# Altium PCB Main.PcbDoc (part 2 of 2)
Units mm, origin at the board's own origin, x right, y up, seen from the top; angles counter-clockwise.
Board outline 229.74 x 100.58 mm, 4 copper layers (Top Layer, Layer 1, Layer 2, Bottom Layer), stack 0.68 mm thick; 134 components, 86 nets, 560 pads, 37 vias.
Unrouted connection lines stored in the file: 186.
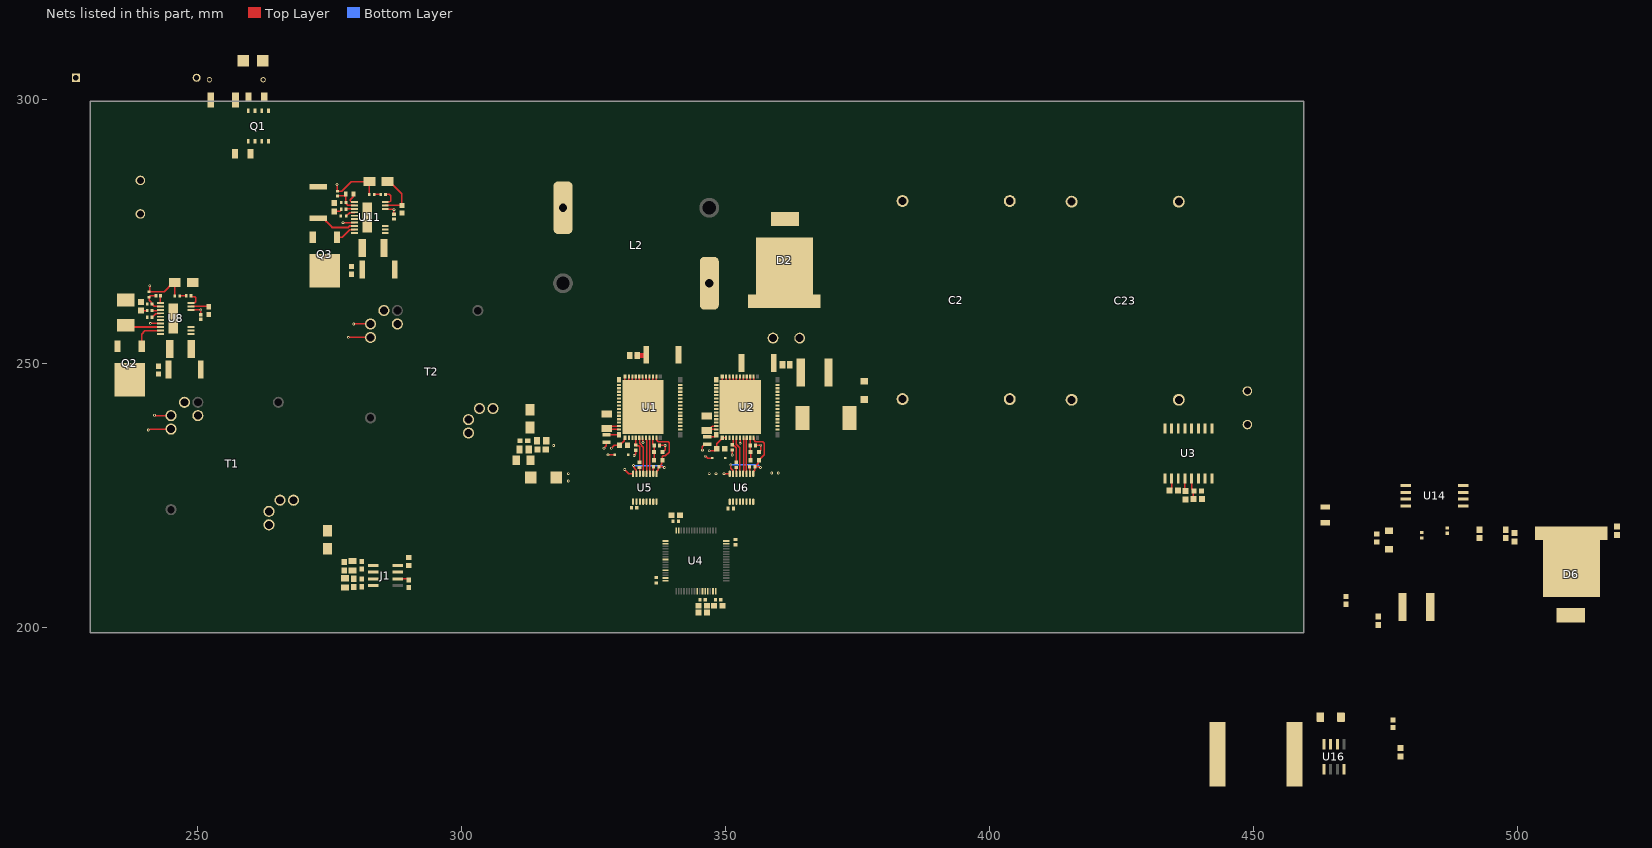
[diagram p4: the nets of this part, all layers, seen from the top]

## Part data
C1 C62: library part CAP-470n, "0.47 µF ±10% 630V Ceramic Capacitor X7R 2220 (5750 Metric)", Capacitance=470nF, Mfr_Name=Kemet, Voltage=630V, ComponentLink1Description=Datasheet, ComponentLink1URL=https://search.murata.co.jp/Ceramy/image/img/A01X/G101/ENG/GRM55DR7LV474KW01-00B.pdf
C2 C23: library part CAP-40u, "40 µF Film Capacitor 600V Polypropylene (PP), Metallized Radial - 4 Leads", Capacitance=40uF, Insulation Resistance=250MOhm, Manufacturer="Wurth Elektronik", Operating Temperature Max=105°C, Operating Temperature Min=-40°C, Rate of Voltage Rise=30V/us, Rated Voltage (DC)=600V, Category="Film Capacitors", ComponentLink1Description="Website Link", ComponentLink1URL=https://www.we-online.com/redexpert/article/890764428004CS?ad, ComponentLink2Description="Datasheet Link", ComponentLink2URL=https://www.we-online.com/redexpert/spec/890764428004CS?ad, Dissipation Factor @1kHz=0.2%, Height=45mm, Length=42mm, Manufacturer Part Number=890764428004CS, Match Code=WCAP-FTDB, Mount="Through Hole", Packaging=Carton, Pitch=37.5mm, Technical Reference=MDBP375406J600DCPP15040, Voltage=600V, Width=30mm
C3 C6: library part CAP-33p-1kV, "SMD Comm C0G HV, Ceramic, 33 pF, 5%, 1000 VDC, C0G, SMD, MLCC, Ultra-Stable, Low Loss, Class I, 0805", Manufacturer_Name=Kemet, Copyright="Copyright (C) 2025 Ultra Librarian. All rights reserved.", Datasheet=https://search.kemet.com/download/datasheet/C0805C330JDGAC7800, Manufacturer_Part_Number=C0805C330JDGACTU, Parameter 1=33pF, Parameter 2=1kV
C4: library part CAP-4.7n, "4700 pF ±5% 630V Ceramic Capacitor C0G, NP0 1206 (3216 Metric)", Capacitance=4.7nF, Insulation Resistance=250MOhm, Manufacturer="Wurth Elektronik", Manufacturer Part Number=890764428004CS, Operating Temperature Max=105°C, Operating Temperature Min=-40°C, Rate of Voltage Rise=30V/us, Rated Voltage (DC)=600V, Voltage=630V, Category="Film Capacitors", ComponentLink2Description="Datasheet Link", ComponentLink2URL=https://www.yageo.com/upload/media/product/app/datasheet/mlcc/upy-np0x7r_hv_500v-to-3kv.pdf, Dissipation Factor @1kHz=0.2%, Height=45mm, Length=42mm, Match Code=WCAP-FTDB, Mount="Through Hole", Packaging=Carton, Pitch=37.5mm, Technical Reference=MDBP375406J600DCPP15040, Width=30mm
C5: library part CAP-1n, "1000 pF ±5% 200V Ceramic Capacitor C0G, NP0 1206 (3216 Metric)", Package="3216 KEMET", Check_prices=https://www.snapeda.com/parts/C1206C102J2GACTU/KEMET/view-part/?ref=eda, ComponentLink1Description=Datasheet, ComponentLink1URL=https://search.kemet.com/download/datasheet/C1206C102J2GAC7800, MF=KEMET, MP=C1206C102J2GACTU, Parameter 1=200V, SnapEDA_Link=https://www.snapeda.com/parts/C1206C102J2GACTU/KEMET/view-part/?ref=snap
C7: library part CAP-40n, "0.047 µF ±5% 250V Ceramic Capacitor C0G, NP0 1812 (4532 Metric)", Capacitance=40uF, Insulation Resistance=250MOhm, Manufacturer="Wurth Elektronik", Manufacturer Part Number=890764428004CS, Operating Temperature Max=105°C, Operating Temperature Min=-40°C, Rate of Voltage Rise=30V/us, Rated Voltage (DC)=600V, Category="Film Capacitors", ComponentLink2Description=Datasheet, ComponentLink2URL=https://product.tdk.com/en/system/files/dam/doc/product/capacitor/ceramic/mlcc/catalog/mlcc_commercial_midvoltage_en.pdf, Dissipation Factor @1kHz=0.2%, Height=45mm, Length=42mm, Match Code=WCAP-FTDB, Mount="Through Hole", Packaging=Carton, Pitch=37.5mm, Technical Reference=MDBP375406J600DCPP15040, Voltage=600V, Width=30mm
C8 C9 C10 C11 C16 C17 C18 C20 C49 C59 C60: library part CAP-0.1U-0001, "CAP CER 0.1UF 16V X7R 0402", Capacitance="100 nF", Voltage Rating="16 V", ComponentLink2Description=Datasheet, ComponentLink2URL=https://www.yageo.com/upload/media/product/productsearch/datasheet/mlcc/UPY-GPHC_X7R_6.3V-to-250V_24.pdf, Device Class=Ceramic, Size=0402
C12 C30 C31 C42 C50 C66: library part CAP-4.7U-0001, "CAP CER 4.7UF 25V X5R 0603", Capacitance="4.7 uF", Voltage=25V, Device Class=Ceramic, Size=0603
C13 C15 C52 C58 C61: library part CAP-1U-0002, "CAP CER 1UF 16V X7R 0603", Capacitance="1.0 uF", Voltage=16V, Device Class=Ceramic, Size=0603
C14 C64: library part CAP-10N-0002, "CAP CER 10000PF 50V X7R 0603", Capacitance="10 nF", Voltage="50 V", ComponentLink2Description=Datasheet, ComponentLink2URL=http://www.yageo.com/documents/recent/UPY-GPHC_X7R_6.3V-to-50V_18.pdf, Device Class=Ceramic, Size=0603
C19 C22: library part CAP-2.2U-0001, "CAP CER 2.2UF 100V X7R 1206", Capacitance=2.2uF, Voltage=100V, ComponentLink1Description=Datasheet, ComponentLink1URL=https://www.yageo.com/upload/media/product/productsearch/datasheet/mlcc/UPY-GPHC_X7R_6.3V-to-250V_24.pdf, Device Class=Ceramic, Size=1206
C21: library part CAP-40u_25V, "47 µF ±20% 25V Ceramic Capacitor X5R 1206 (3216 Metric)", Capacitance=40uF, Insulation Resistance=250MOhm, Manufacturer="Wurth Elektronik", Manufacturer Part Number=890764428004CS, Operating Temperature Max=105°C, Operating Temperature Min=-40°C, Rate of Voltage Rise=30V/us, Rated Voltage (DC)=600V, Voltage=25V, Category="Film Capacitors", ComponentLink2Description="Datasheet Link", ComponentLink2URL=https://product.tdk.com/system/files/dam/doc/product/capacitor/ceramic/mlcc/catalog/mlcc_commercial_general_en.pdf, Dissipation Factor @1kHz=0.2%, Height=45mm, Length=42mm, Match Code=WCAP-FTDB, Mount="Through Hole", Packaging=Carton, Pitch=37.5mm, Technical Reference=MDBP375406J600DCPP15040, Width=30mm
C24 C25 C55 C56: library part CAP-100P-0001, "CAP CER 100PF 50V C0G/NPO 0402", Capacitance="100 pF", Voltage=50V, ComponentLink1Description=Datasheet, ComponentLink1URL=https://www.yageo.com/upload/media/product/productsearch/datasheet/mlcc/UPY-GP_NP0_16V-to-50V_18.pdf, Device Class=Ceramic, Size=0402
C26 C38: library part CAP-1.5n-250V, "1500 pF ±5% 250V Ceramic Capacitor C0G, NP0 0603 (1608 Metric)", Manufacturer_Name=Kemet, Manufacturer_Part_Number=C0805C330JDGACTU, Copyright="Copyright (C) 2025 Ultra Librarian. All rights reserved.", Datasheet="1500 pF ±5% 250V Ceramic Capacitor C0G, NP0 0603 (1608 Metric)", Parameter 1=1.5nF, Parameter 2=250V
C27 C32 C34 C39 C44 C51 C54 C63 C67: library part CAP-100n, "0.1 µF ±10% 50V Ceramic Capacitor X7R 0603 (1608 Metric)", Capacitance=100nF, Mfr_Name=Yageo, Voltage=50V, ComponentLink1Description=Datasheet, ComponentLink1URL=https://www.yageo.com/upload/media/product/productsearch/datasheet/mlcc/UPY-GPHC_X7R_6.3V-to-250V_24.pdf
C28 C29 C40 C41: library part CAP-1U-0001, "CAP CER 1UF 50V X7R 0805", Capacitance="1.0 uF", Voltage="50 V", ComponentLink2Description=Datasheet, ComponentLink2URL=https://www.yageo.com/upload/media/product/productsearch/datasheet/mlcc/UPY-GPHC_X7R_6.3V-to-250V_24.pdf, Device Class=Ceramic, Size=0805
C33 C43: library part CAP-1u-200V, "1 µF ±10% 200V Ceramic Capacitor X7R 1812 (4532 Metric)", Capacitance=1uF, Mfr_Name=Yageo, Voltage=200V, ComponentLink1Description=Datasheet, ComponentLink1URL=https://datasheets.kyocera-avx.com/KGM_X7R.pdf
C35 C45: library part CAP-2.2u-25V, "2.2 µF ±10% 25V Ceramic Capacitor X5R 0402 (1005 Metric)", Capacitance=2.2uF, Mfr_Name=Yageo, Voltage=25V, ComponentLink1Description=Datasheet, ComponentLink1URL=https://search.kemet.com/download/datasheet/C0603C222J2GAC7867
C36 C46: library part CAP-47pF-50V, "47 pF ±1% 50V Ceramic Capacitor C0G, NP0 0402 (1005 Metric)", Capacitance=47pF, Mfr_Name=Yageo, Voltage=50V, ComponentLink1Description=Datasheet, ComponentLink1URL=https://search.kemet.com/download/datasheet/C0402C470F5GAC7867
C37 C47: library part CAP-0.22U-0001, "CAP CER 0.22UF 50V X7R 0603", Capacitance=0.22uF, Voltage=50V, ComponentLink1Description=Datasheet, ComponentLink1URL=https://www.yageo.com/upload/media/product/productsearch/datasheet/mlcc/UPY-GPHC_X7R_6.3V-to-250V_24.pdf, Device Class=Ceramic, Size=0603
C48 C57: library part CAP-10u-25V, "10 µF ±10% 25V Ceramic Capacitor X5R 0603 (1608 Metric)", Capacitance=10uF, Mfr_Name=Yageo, Voltage=25V, ComponentLink1Description=Datasheet, ComponentLink1URL=https://search.murata.co.jp/Ceramy/image/img/A01X/G101/ENG/GRM188R61E106KA73-01.pdf
C53 C65: library part CAP-10u, "10 µF ±20% 16V Ceramic Capacitor X6S 0603 (1608 Metric)", Capacitance=10uF, Mfr_Name=Kemet, Voltage=16V, ComponentLink1Description=Datasheet, ComponentLink1URL=https://search.murata.co.jp/Ceramy/image/img/A01X/G101/ENG/GRM188C81C106MA73-01.pdf
D1: library part DIO-ZENER-600, "Diode 600 V 12A Through Hole TO-220AC", Mfr_Name=STMicroelectronics, ComponentLink1Description=Datasheet, ComponentLink1URL=https://www.st.com/content/ccc/resource/technical/document/datasheet/cb/a3/4c/74/1c/4a/40/56/CD00002494.pdf/files/CD00002494.pdf/jcr:content/translations/en.CD00002494.pdf, Parameter 1=600V, Parameter 2=12A
D2 D6: library part DIO-TVS-240, "295V (Typ) Clamp 100A Ipp Tvs Diode Surface Mount", Current Rating=100A, Standoff Voltage=240V, ComponentLink1Description=Datasheet, ComponentLink1URL=https://www.bourns.com/docs/product-datasheets/ptvs1-240c-m.pdf
D3: library part DIO-TVS-21.2V-28.8A, "21.2V Clamp 28.8A Ipp Tvs Diode Surface Mount DO-214AA (SMB)", Mfr_Name="Littelfuse Inc", ComponentLink1Description=Datasheet, ComponentLink1URL=https://www.bourns.com/docs/Product-Datasheets/P6SMB.pdf, Parameter 1=21.2V, Parameter 2=28.8A
D4 D5: library part DIO-ZENER-16V, "Zener Diode 16 V 300 mW ±6% Surface Mount SOD-323", Mfr_Name=STMicroelectronics, ComponentLink1Description=Datasheet, ComponentLink1URL=SOD-323_1P8X1P35_ONS-L, Parameter 2=16V
J1: library part LDO-3v3, "Linear Voltage Regulator IC Positive Fixed 1 Output 1.5A 8-SOIC", Package=None, Availability=Unavailable, ComponentLink1Description=Datasheet, ComponentLink1URL=https://ww1.microchip.com/downloads/en/DeviceDoc/21999b.pdf, MP=MCP1727T-3302E/SN, Price=None
J2 J3: library part CONN-300V-30A-2POS, "6.35mm Pitch Beau Eurostyle Fixed Mount PCB Terminal Block, Modular, 2 Circuits", Manufacturer_Name="Molex Connector Corporation", Copyright="Copyright (C) 2025 Ultra Librarian. All rights reserved.", Datasheet=https://www.molex.com/en-us/products/part-detail-pdf/393800102?display=pdf, Manufacturer_Part_Number=393800102, RefDes=RefDes, Type="Headers, Plugs and Sockets"
L1: library part IND-2.5u, "2.5 µH Shielded Drum Core, Wirewound Inductor 18.1 A 5.9mOhm Max 2-SMD, J-Lead", Mfr_Name=Panasonic, ComponentLink1Description=Datasheet, ComponentLink1URL=https://industrial.panasonic.com/cdbs/www-data/pdf/AGL0000/AGL0000C59.pdf, Parameter 1=2.5uH, Parameter 2=5.8mOhm, Parameter 3=18.1A
L2: library part IND-33u-32A-6m, "WE-HCFT THT High Current Inductor, size 3540, 33µH, 32A", Case/Size Code=3540, DC Resistance=5.67mΩ, DC Resistance Max=6.38mΩ, Inductance=33µH, Inductance Tolerance=20%, Manufacturer="Wurth Elektronik", Max Operating Temperature=125°C, Min Operating Temperature=-40°C, Rated Current=32A, Saturation Current=38.9A, Self Resonant Frequency=7MHz, Category="Power Inductors", ComponentLink1Description="Website Link", ComponentLink1URL=https://www.we-online.com/redexpert/article/7443763540330?ad, ComponentLink2Description="Datasheet Link", ComponentLink2URL=https://www.we-online.com/redexpert/spec/7443763540330?ad, Height=35mm, Length=36mm, Manufacturer Part Number=7443763540330, Match Code=WE-HCFT, Mount="Through Hole", Packaging=Tray, Parameter 1=6.38mOhm, Parameter 2=32A, Parameter 3=33uH, Width=41mm
L3 L4: library part IND-4.7u, "4.7 µH Shielded Inductor 1 A 426mOhm Max 0806 (2016 Metric)", ComponentLink1Description=Datasheet, ComponentLink1URL=https://www.cyntec.com/upfile/products/download/SDEM20161T-000%20(A4).pdf, Parameter 1=4.7uH, Parameter 2=426mOhm, Parameter 3=1A
L5: library part IND-100u, "IHLP-6767GZ-11 100 20% ER E3", Manufacturer_Name=Vishay, Copyright="Copyright (C) 2025 Ultra Librarian. All rights reserved.", Datasheet=https://www.vishay.com/doc?34282, Manufacturer_Part_Number=IHLP6767GZER101M11, Parameter 1=100uH, Parameter 2=5A, Parameter 3=110mOhm
Q1: library part MOSFET-PCH, "P-Channel 30 V 25.4A (Ta), 100A (Tc) 2.5W (Ta), 125W (Tc) Surface Mount PG-TDSON-8-1", Manufacturer="Infineon Technologies", ComponentLink1Description=Datasheet, ComponentLink1URL=https://www.infineon.com/dgdl/BSC030P03NS3+G_2.0.pdf?folderId=db3a304314dca38901154a72e3951a65&fileId=db3a30431d8a6b3c011d90d084910435, Manufacturer Order Number="BSC030P03NS3 G", PackageReference=PG-TDSON-8-1
Q2 Q3: library part FET-800V-11A, "Insulated-Gate Field-Effect Transistor (IGFET), N-Channel, Enhancement, Body Diode, ESD Diode Gate/Source, Pin 1 Gate, 2 Drain, 3 Source, 3 Pins", Manufacturer="Infineon Technologies", ComponentLink1Description=Datasheet, ComponentLink1URL=https://www.infineon.com/dgdl/Infineon-IPD80R450P7-DS-v02_00-EN.pdf?fileId=5546d4625607bd1301562e3b26963327, Manufacturer Order Number=IPD80R450P7, PackageReference=PG-TO252-3-342
R1: library part RES-100k-0001, "RES SMD 100K OHM 1% 1/10W 0603", Power=100mW, Resistance=100k, Tolerance=1%, ComponentLink1Description=Datasheet, ComponentLink1URL=https://www.yageo.com/upload/media/product/products/datasheet/rchip/PYu-RC_Group_51_RoHS_L_12.pdf, Size=0603
R2 R3: library part RES-240-2W, "240 Ohms ±1% 2W Chip Resistor 2512 (6332 Metric) Automotive AEC-Q200, Moisture Resistant Thick Film", Power=2W, Resistance=240, ComponentLink1Description=Datasheet, ComponentLink1URL=https://www.te.com/commerce/DocumentDelivery/DDEController?Action=srchrtrv&DocNm=9-1773463-5&DocType=DS&DocLang=English
R4: library part RES-125k, "150 kOhms ±5% 0.667W, 2/3W Chip Resistor 1206 (3216 Metric) Automotive AEC-Q200, Pulse Withstanding Thick Film", Power=2/3W, Resistance=125k, ComponentLink1Description=Datasheet, ComponentLink1URL=https://industrial.panasonic.com/cdbs/www-data/pdf/RDO0000/AOA0000C331.pdf
R5: library part RES-100k, "100 kOhms ±1% 0.25W, 1/4W Through Hole Resistor Axial Metal Film", Power=1/4W, Resistance=100k, ComponentLink1Description=Datasheet, ComponentLink1URL=https://www.yageo.com/upload/media/product/app/datasheet/lr/yageo-mfr_datasheet.pdf
R6: library part RES-1M, "1 MOhms ±5% 1W Through Hole Resistor Axial High Voltage, Pulse Withstanding Metal Film", Power=1W, Resistance=1M, ComponentLink1Description=Datasheet, ComponentLink1URL=https://www.vishay.com/docs/28907/vr25vr37vr68.pdf
R7 R12: library part RES-100-0001, "RES 100 OHM 1% 1/16W 0402", Power=1/16W, Resistance=100R, Tolerance=1%, ComponentLink1Description=Datasheet, ComponentLink1URL=https://www.yageo.com/upload/media/product/products/datasheet/rchip/PYu-RC_Group_51_RoHS_L_12.pdf, Size=0402
R8 R9 R10 R11: library part RES-0, "0 Ohms Jumper Chip Resistor 0603 (1608 Metric) Automotive AEC-Q200, Pulse Withstanding Thick Film", Power=1/3W, Resistance=0, ComponentLink1Description=Datasheet, ComponentLink1URL=https://www.vishay.com/docs/20043/crcwhpe3.pdf
R13 R21: library part RES-39, "39 Ohms ±1% 2W Chip Resistor 2512 (6332 Metric) Pulse Withstanding Thick Film", Power=2W, Resistance=39, ComponentLink1Description=Datasheet, ComponentLink1URL=https://www.te.com/usa-en/product-2176331-8.datasheet.pdf
R14 R22: library part RES-20k, "20 kOhms ±0.1% 0.063W, 1/16W Chip Resistor 0402 (1005 Metric) Automotive AEC-Q200 Thin Film", Power=1/16W, Resistance=20k, ComponentLink1Description=Datasheet, ComponentLink1URL=https://industrial.panasonic.com/cdbs/www-data/pdf/RDM0000/AOA0000C307.pdf
R15: library part RES-63.4k, "63.4 kOhms ±1% 0.063W, 1/16W Chip Resistor 0402 (1005 Metric) Moisture Resistant Thick Film", Power=1/16W, Resistance=63.4k, ComponentLink1Description=Datasheet, ComponentLink1URL=https://www.yageo.com/upload/media/product/products/datasheet/rchip/PYu-RC_Group_51_RoHS_L_12.pdf
R16: library part RES-200m, "200 mOhms ±5% 2W Chip Resistor 2512 (6432 Metric) Current Sense Thick Film", Power=2W, Resistance=200m, ComponentLink1Description=Datasheet, ComponentLink1URL=https://www.bourns.com/docs/product-datasheets/crm.pdf
R17 R20 R25 R28: library part RES-10k_1/16W, "10 kOhms ±1% 0.063W, 1/16W Chip Resistor 0402 (1005 Metric) Automotive AEC-Q200 Thick Film", Power=1/16W, Resistance=10k, ComponentLink1Description=Datasheet, ComponentLink1URL=https://www.vishay.com/docs/20035/dcrcwe3.pdf
R18 R27: library part RES-92k, "92 kOhms ±0.1% 0.063W, 1/16W Chip Resistor 0402 (1005 Metric) Thin Film", Power=1/16W, Resistance=92k, ComponentLink1Description=Datasheet, ComponentLink1URL=https://www.yageo.com/upload/media/product/app/datasheet/rchip/pyu-rt_1-to-0.01_rohs_l.pdf
R19: library part RES-34k, "34 kOhms ±1% 0.1W, 1/10W Chip Resistor 0402 (1005 Metric) Automotive AEC-Q200 Thick Film", Power=1/10W, Resistance=34k, ComponentLink1Description=Datasheet, ComponentLink1URL=https://industrial.panasonic.com/cdbs/www-data/pdf/RDA0000/AOA0000C304.pdf
R23: library part RES-47k, "47 kOhms ±1% 0.1W, 1/10W Chip Resistor 0402 (1005 Metric) Automotive AEC-Q200 Thick Film", Power=1/10W, Resistance=47k, ComponentLink1Description=Datasheet, ComponentLink1URL=https://industrial.panasonic.com/cdbs/www-data/pdf/RDA0000/AOA0000C304.pdf
R24: library part RES-300m, "300 mOhms ±1% 2W Chip Resistor 2512 (6432 Metric) Automotive AEC-Q200, Current Sense Thick Film", Power=2W, Resistance=300m, ComponentLink1Description=Datasheet, ComponentLink1URL=https://www.seielect.com/catalog/sei-csr_csrn.pdf
R26: library part RES-25k, "25 kOhms ±0.1% 0.15W Chip Resistor 0603 (1608 Metric) Anti-Sulfur, Moisture Resistant, Non-Inductive, Non-Magnetic Thin Film", Power=0.15W, Resistance=25k, ComponentLink1Description=Datasheet, ComponentLink1URL=https://www.vishay.com/docs/60057/pnm.pdf
R29 R32: library part RES-47-0001, "RES 47 OHM 1% 1/10W 0603", Power=1/10W, Resistance=47R, Tolerance=1%, ComponentLink1Description=Datasheet, ComponentLink1URL=https://www.yageo.com/upload/media/product/products/datasheet/rchip/PYu-RC_Group_51_RoHS_L_12.pdf, Size=0603
R30: library part RES-240k-2/3W, "240 kOhms ±1% 0.667W, 2/3W Chip Resistor 1206 (3216 Metric) Automotive AEC-Q200, Pulse Withstanding Thick Film", Power=2/3W, Resistance=240k, ComponentLink1Description=Datasheet, ComponentLink1URL=https://industrial.panasonic.com/cdbs/www-data/pdf/RDO0000/AOA0000C331.pdf
R31: library part RES-5k-1/4W, "5 kOhms ±0.1% 0.25W, 1/4W Chip Resistor 1206 (3216 Metric) Thin Film", Power=1/4W, Resistance=5k, ComponentLink1Description=Datasheet, ComponentLink1URL=https://www.yageo.com/upload/media/product/app/datasheet/rchip/pyu-rt_1-to-0.01_rohs_l.pdf
T1 T2: library part TRANS-8:1:1-424V-12V, "WE-OLLT Offline Flyback Transformer, THT, RM10, Ui = 71 - 424V, Uo = 12V / 3A", Auxiliary Voltage=12V, Case/Size Code=RM10, Inductance=670uH, Input Voltage="71 - 424V (AC)", Insulation Test Voltage="3000V (AC)", Manufacturer="Wurth Elektronik", Operating Temperature Max=125°C, Operating Temperature Min=-40°C, Output Current=3A, Switching Frequency=140kHz, Category="Transformers For AC-DC Converter", ComponentLink1Description="Website Link", ComponentLink1URL=https://www.we-online.com/redexpert/article/750317589?ad, ComponentLink2Description="Datasheet Link", ComponentLink2URL=https://www.we-online.com/redexpert/spec/750317589?ad, Height=20.5mm, Length=31.5mm, Manufacturer Part Number=750317589, Match Code=WE-OLLT, Mount="Through Hole", Output Voltage=12V, Packaging=Tray, Saturation Current=3A, Width=31.5mm
U1 U2: library part FET-600V-55A, "Power Switch/Driver 1:1 N/P-Channel 40A 54-VQFN (12x12)", Mfr_Name="Texas Instruments", ComponentLink1Description=Datasheet, ComponentLink1URL=https://www.ti.com/lit/ds/symlink/lmg3422r030.pdf, RefDes=RefDes, Type=TYPE
U3: library part IC-CURRSENSE, "Current Sensor 15A 1 Channel Hall Effect Bidirectional 16-SOIC (0.295\", 7.50mm Width)", Mfr_Name="Allegro Microsystems Inc.", ComponentLink1Description=Datasheet, ComponentLink1URL=https://www.allegromicro.com/-/media/files/datasheets/acs37002-datasheet.pdf, RefDes=RefDes, Type=Type
U4: library part IC_STM32G4, "ARM® Cortex®-M4F STM32G4 Microcontroller IC 32-Bit Single-Core 170MHz 512KB (512K x 8) FLASH 64-LQFP (10x10)", Mfr_Name=STMicroelectronics, ComponentLink1Description=Datasheet, ComponentLink1URL=https://www.st.com/resource/en/datasheet/stm32g474cb.pdf, RefDes=RefDes, Type=Type
U5 U6: library part IC-DIGITAL-ISO-4CH, "General Purpose Digital Isolator 3000Vrms 4 Channel 100Mbps 85kV/µs CMTI 16-SSOP (0.154\", 3.90mm Width)", Mfr_Name="Texas Instruments", ComponentLink1Description=Datasheet, ComponentLink1URL=https://www.ti.com/general/docs/suppproductinfo.tsp?distId=10&gotoUrl=https%3A%2F%2Fwww.ti.com%2Flit%2Fgpn%2Fiso7742, RefDes=RefDes, Type=TYPE
U7 U9 U10 U12: library part DIO-SCHOT-1.4A, "Diode 40 V 1.4A Surface Mount DO-214AC (SMA)", Mfr_Name=Comchip, ComponentLink1Description=Datasheet, ComponentLink1URL=https://www.comchiptech.com/admin/files/product/CDBA140SL-HF%20RevD951086.pdf, Parameter 1=40V, Parameter 2=1.4A
U8 U11: library part IC-FLYBACK, "Buck, Boost, Flyback Regulator Positive Output Step-Up, Step-Down DC-DC Controller IC 20-TSSOP-EP", Mfr_Name="Analog Devices Inc", ComponentLink1Description=Datasheet, ComponentLink1URL=https://www.analog.com/media/en/technical-documentation/data-sheets/LT8316.pdf, RefDes=RefDes, Type="Power Management"
U13: library part DIO-SCHOT-650V-1A, "Diode 650 V 1A Surface Mount DO-214AA", Mfr_Name=Comchip, ComponentLink1Description=Datasheet, ComponentLink1URL=https://genesicsemi.com/sic-schottky-mps/GB01SLT06-214/GB01SLT06-214.pdf, Parameter 1=650V, Parameter 2=1A
U14: library part IC-VOLT-SENSE, "0-V to 5-V input, precision voltage sensing reinforced isolated amplifier 8-SOIC -40 to 125", Manufacturer_Name="Texas Instruments", ComponentLink1Description=https://mm.digikey.com/Volume0/opasdata/d220001/medias/docus/6130/amc1351.pdf, Copyright="Copyright (C) 2025 Ultra Librarian. All rights reserved.", Datasheet=https://www.ti.com/lit/gpn/amc1351, Manufacturer_Part_Number=AMC1351DWV, RefDes=RefDes, Type=Linear
U15: library part DIO-SCHOT-20V-1A, "Diode 20 V 1A Surface Mount DO-214AC (SMA)", Mfr_Name=Comchip, ComponentLink1Description=Datasheet, ComponentLink1URL=https://diotec.com/request/datasheet/sk12.pdf, Parameter 1=20V, Parameter 2=1A
U16: library part IC-BUCK-12V-5V-1, "SIMPLE SWITCHER&reg; 40V, 500mA Low Component Count Step-Down Regulator 8-SOIC -40 to 125", Package="SOIC-8 Texas Instruments", Availability=Good, Check_prices=https://www.snapeda.com/parts/LM2674MX-5.0/NOPB/Texas%20Instruments/view-part/1037916/?ref=eda, ComponentLink1Description=Datasheet, ComponentLink1URL=https://www.ti.com/general/docs/suppproductinfo.tsp?distId=10&gotoUrl=https%3A%2F%2Fwww.ti.com%2Flit%2Fgpn%2Flm2674, MF="Texas Instruments", MP=LM2674MX-5.0/NOPB, Price=None, Purchase-URL=https://pricing.snapeda.com/search/part/LM2674MX-5.0/NOPB/?ref=eda, SnapEDA_Link=https://www.snapeda.com/parts/LM2674MX-5.0/NOPB/Texas%20Instruments/view-part/1037916/?ref=snap

## Via types
v1: diameter 0.508, hole 0.203, Top Layer to Bottom Layer, 37 vias

## Nets (pads, with @x,y where several pads share a name; then routed paths per layer and width w, separated by ;. In a path a pad name is that pad's centre, name@x,y a point inside that pad or via, vN(x,y) a via of type N, cw(c..) or ccw(c..) an arc to the next point about the centre after c; other vN are vias at no path point)
3V3: C8.1 C9.1 C10.1 C11.1 C12.1 C13.1 C14.1 C15.1 C16.1 C17.1 C20.1 C52.1 C53.2 C60.1 C61.1 J1.7 J1.8 U3.10 U4.1 U4.16 U4.28 U4.29 U4.32 U4.48 U4.64 U5.10 U5.16 U6.10 U6.16 U14.8 | length 2.4
  Top Layer w0.254: C52.1@434.048,225.933 434.467,226.352 U3.10@434.467,228.181
5V_Bootstrap: C64.1 U16.1
5V_Buck: C65.2 L5.1 U16.4
5V_Ctrl: C27.2 C28.1 C29.1 C30.1 C31.1 C54.2 J1.1 J1.2 J1.3 U7.1
5V_DI_HS_HP: C49.1 R8.2 U2.53 U6.1 U6.7 | length 18.1
  Top Layer w0.254: v1(351.028,230.759) 351.062,230.725 351.062,230.124 351.445,229.741 351.445,229.094 U6.7@351.472,229.066 ; U6.1@355.282,229.066 355.282,229.451 355.35,229.519 355.404,229.519 355.592,229.707 C49.1@355.592,230.378 356.455,230.378 356.582,230.251 v1(356.65,230.251) ; U2.53@355.361,235.881 355.434,235.808 355.434,235.391 355.703,235.122 357.079,235.122 357.378,234.823 357.378,232.686 356.362,231.67 R8.2@356.362,231.648 356.264,231.55 356.264,231.1 C49.1@355.592,230.428
  Bottom Layer w0.254: v1(351.028,230.759) 356.142,230.759 v1(356.65,230.251)
5V_DI_LS_HP: C18.2 R10.2 U1.53 U5.1 U5.7 | length 19
  Top Layer w0.254: v1(332.613,230.632) 332.635,230.61 332.635,230.264 333.157,229.741 333.157,229.094 U5.7@333.185,229.066 ; U1.53@336.946,235.881 337.019,235.808 337.019,235.391 337.269,235.142 339.195,235.142 339.344,234.993 339.344,233.181 338.604,232.442 338.239,232.442 338.09,232.293 R10.2@338.09,231.648 337.991,231.55 337.991,230.938 337.654,230.601 337.604,230.601 337.431,230.428 C18.2@337.431,230.378 ; U5.1@336.994,229.066 336.994,229.531 337.258,229.794 337.258,230.205 C18.2@337.431,230.378 ; v1(338.455,230.251) 338.386,230.251 338.259,230.378 C18.2@337.431,230.378
  Bottom Layer w0.254: v1(332.613,230.632) 338.005,230.632 338.386,230.251 v1(338.455,230.251)
5V_SW: C64.2 L5.2 U15.K U16.8
12V_Gate: C21.2 C39.2 C40.1 C41.1 C42.1 C57.2 C66.1 C67.2 D5.1 U1.46 U10.1 U13.2 U16.7
ADC1_IN1: U4.12
ADC3_IN1: U4.25
BBNEG_HS: C22.2 U2.41 U2.42 | length 4.2
  Top Layer w0.254: U2.42@348.276,237.456 346.654,237.456 C22.2@346.456,237.258 346.831,237.258 347.329,237.756 347.329,237.94 347.495,238.106 U2.41@348.276,238.106
BBNEG_LS: C19.2 U1.41 U1.42 | length 4.9
  Top Layer w0.254: U1.42@329.861,237.456 327.716,237.456 C19.2@327.533,237.639 328,238.106 U1.41@329.861,238.106
BBSW_HS: L3.1 U2.43 | length 1.9
  Top Layer w0.254: L3.1@346.586,236.063 347.858,236.063 347.878,236.083 348.003,236.083 348.276,236.356 U2.43@348.276,236.481
BBSW_LS: L4.1 U1.43 | length 2.1
  Top Layer w0.254: L4.1@327.76,236.439 329.819,236.439 U1.43@329.861,236.481
BIAS_5V: C34.2 U8.9 U9.1 | length 3.4
  Top Layer w0.254: U8.9@248.879,260.752 252.163,260.752 C34.2@252.222,260.693
BIAS_12V: C44.2 U11.9 U12.1 | length 9.1
  Top Layer w0.254: U11.9@285.623,279.871 C44.2@288.798,279.87 ; U12.1@286.055,284.353 286.626,283.781 287.093,283.781 288.797,282.078 C44.2@288.798,279.87 ; C44.2@288.798,279.87 C44.2@288.798,279.87
Ctrl_Primary-: C26.2 Q2.2 T1.10
Ctrl_Secondary+: T1.6 T1.7 U7.2
Ctrl_Tertiary+: C36.2 R19.1 T1.2 U9.2 | length 13.7
  Top Layer w0.254: v1(240.792,237.363) 240.861,237.363 241.026,237.528 T1.2@245.072,237.528 ; v1(241.046,264.668) 241.046,263.66 241.042,263.656 241.042,263.644 240.931,263.533 R19.1@240.919,263.533 243.746,263.533 245.516,265.303 U9.2@245.77,265.303 245.776,265.297 C36.2@245.776,262.763
DCM_5V: R17.2 U8.10 | length 2.8
  Top Layer w0.254: R17.2@248.857,262.763 248.857,262.718 248.985,262.59 249.565,262.59 249.713,262.441 249.713,261.602 249.565,261.453 248.93,261.453 U8.10@248.879,261.402
DCM_12V: R25.1 U11.10 | length 3.2
  Top Layer w0.254: U11.10@285.623,280.521 286.49,280.521 286.639,280.67 286.639,281.686 286.385,281.94 R25.1@285.687,281.94
EN/UVLO_5V: C35.1 U8.8 U8.17 | length 4.6
  Top Layer w0.254: v1(241.173,257.556) 241.2,257.529 243.048,257.529 U8.17@243.075,257.502 ; U8.8@248.879,260.102 248.882,260.099 250.695,260.099 v1(250.698,260.096) C35.1@250.698,259.207
EN/UVLO_12V: C45.1 U11.8 U11.17 | length 4.8
  Top Layer w0.254: v1(277.622,276.606) 277.63,276.614 279.812,276.614 U11.17@279.819,276.621 ; U11.8@285.623,279.221 285.674,279.17 287.181,279.17 v1(287.274,279.077) C45.1@287.274,278.188
FAULT_HS_HP: U2.48 U6.5 | length 7.1
  Top Layer w0.254: U2.48@352.111,235.881 352.111,234.629 352.724,234.016 352.724,230.822 352.724,229.084 U6.5@352.743,229.066
FAULT_HS_LP: U6.12
FAULT_LS_HP: U1.48 U5.5 | length 7.1
  Top Layer w0.254: U1.48@333.696,235.881 333.769,235.808 333.769,234.822 334.454,234.136 U5.5@334.454,229.066
FAULT_LS_LP: U5.12
FB_5V: R18.2 R19.2 R20.2 U8.12 | length 4.7
  Top Layer w0.254: R19.2@240.919,262.509 240.919,261.943 241.363,261.499 241.363,261.322 241.933,260.752 U8.12@243.075,260.752 ; R19.2@240.931,262.509 241.185,262.763 R18.2@242.208,262.763
FB_12V: R26.2 R27.2 R28.2 U11.12 | length 5.4
  Top Layer w0.254: R27.2@276.606,281.686 277.898,281.686 278.155,281.944 R26.2@278.155,282.067 278.175,282.048 278.175,280.308 R28.2@278.194,280.289 ; R28.2@278.194,280.244 278.567,279.871 U11.12@279.819,279.871
FILTERED_OUTPUT: C2.2 C23.2 D6.1 L1.1 R4.1 R30.1 U3.5 U3.6 U3.7 U3.8
GATE_5V: Q2.1 U8.19 | length 6.2
  Top Layer w0.254: Q2.1@239.516,253.188 239.516,255.518 240.149,256.151 243.024,256.151 U8.19@243.075,256.202
GATE_12V: Q3.1 U11.19 | length 4
  Top Layer w0.254: Q3.1@276.479,273.812 277.458,273.812 278.916,275.27 279.768,275.27 U11.19@279.819,275.321
Gate_Primary-: C38.2 Q3.2 T2.10
Gate_Secondary+: T2.6 T2.7 U10.2
Gate_Tertiary+: C46.2 R27.1 T2.2 U12.2 | length 14.8
  Top Layer w0.254: v1(276.479,283.845) 276.528,283.796 276.528,282.634 R27.1@276.606,282.556 277.351,282.556 279.148,284.353 U12.2@282.651,284.353 282.606,284.308 C46.2@282.606,281.94 ; v1(278.638,254.889) T2.2@282.829,254.889
GND: C8.2 C9.2 C10.2 C11.2 C12.2 C13.2 C14.2 C15.2 C16.2 C17.2 C20.2 C27.1 C28.2 C29.2 C30.2 C31.2 C32.1 C50.2 C51.1 C52.2 C53.1 C54.1 C60.2 C61.2 J1.4 R1.2 T1.4 T1.5 U3.11 U3.14 U3.15 U3.16 U4.15 U4.27 U4.31 U4.47 U4.63 U5.9 U5.15 U6.9 U6.15 U14.5
HT+: J3.2 U3.1 U3.2 U3.3 U3.4
IREG/SS_5V: R15.1 U8.14 | length 1.9
  Top Layer w0.254: R15.1@241.491,258.699 241.491,258.744 242.148,259.401 243.024,259.401 U8.14@243.075,259.452
IREG/SS_12V: R23.1 U11.14 | length 1.9
  Top Layer w0.254: R23.1@278.261,277.876 278.261,277.888 278.893,278.52 279.768,278.52 U11.14@279.819,278.571
NetC3_2: C3.2 R3.2
NetC4_2: C4.2 C7.1 D3.2 Q1.4 R5.1 R6.2
NetC6_2: C6.2 R2.2 | length 1.8
  Top Layer w0.381: R2.2@334.892,251.46 R2.2@335.019,251.587
  Top Layer w1.016: C6.2@333.314,251.46 R2.2@334.892,251.46
NetC26_1: C26.1 R13.2
NetC32_2: C32.2 J1.6 | length 2.1
  Top Layer w0.254: J1.6@288.036,209.169 289.903,209.169 C32.2@290.068,209.004
NetC36_1: C36.1 R17.1 | length 1
  Top Layer w0.254: 247.015,262.763 R17.1@247.967,262.763
NetC37_1: C37.1 R14.2 | length 1.3
  Top Layer w0.254: C37.1@239.395,259.677 239.687,259.969 R14.2@240.601,259.969
NetC38_1: C38.1 R21.2
NetC46_1: C46.1 R25.2 | length 1.2
  Top Layer w0.254: C46.1@283.56,281.94 R25.2@284.797,281.94
NetC47_1: C47.1 R22.2 | length 1.5
  Top Layer w0.254: C47.1@275.971,278.727 277.057,278.727 277.304,278.974 R22.2@277.304,279.019
NetC58_1: C58.1 C59.1 U14.1
NetLabel58: R30.2 R31.2 U14.2
NetR7_1: R7.1 U5.6 | length 1.2
  Top Layer w0.254: R7.1@333.756,230.259 333.792,230.223 333.792,229.094 U5.6@333.82,229.066
NetR12_1: R12.1 U6.6 | length 1.2
  Top Layer w0.254: R12.1@352.044,230.259 352.08,230.223 352.08,229.094 U6.6@352.107,229.066
NetR29_1: R29.1 U14.7
NetR32_1: R32.1 U14.6
OC_HS_HP: U2.50 U6.4 | length 6.9
  Top Layer w0.254: U6.4@353.377,229.066 353.377,229.531 353.482,229.635 353.482,235.81 U2.50@353.411,235.881
OC_HS_LP: U6.13
OC_LS_HP: U1.50 U5.4 | length 6.9
  Top Layer w0.254: U1.50@334.996,235.881 335.069,235.808 335.069,235.48 335.089,235.459 U5.4@335.089,229.066
OC_LS_LP: U5.13
OCF_CS_LP: U3.9
PGND: C1.1 C2.1 C5.1 C6.1 C7.2 C18.1 C19.1 C21.1 C23.1 C24.2 C33.1 C34.1 C35.2 C37.2 C39.1 C40.2 C41.2 C42.2 C43.1 C44.1 C45.2 C47.2 C56.2 C57.1 C58.2 C59.2 C62.1 C65.1 C66.2 C67.1 D2.2 D5.2 D6.2 J2.1 J3.1 L4.2 R4.2 R6.1 R11.2 R15.2 R16.2 R20.1 R23.2 R24.2 R28.1 R31.1 T1.1 T2.1 T2.4 T2.5 U1.18 U1.19 U1.20 U1.21 U1.22 U1.23 U1.24 U1.25 U1.26 U1.27 U1.28 U1.29 U1.30 U1.31 U1.32 U1.33 U1.34 U1.35 U1.36 U1.37 U1.38 U1.39 U1.40 U1.44 U1.45 U1.49 U1.55 U5.2 U5.8 U8.15 U8.16 U8.20 U8.21 U11.15 U11.16 U11.20 U11.21 U14.3 U14.4 U15.A U16.6 | length 66.8
  Top Layer w0.254: v1(241.935,240.157) 242.004,240.157 242.093,240.068 T1.1@245.072,240.068 ; v1(279.654,257.429) T2.1@282.829,257.429 ; v1(327.025,233.9) 327.503,234.378 L4.2@327.503,235.072 ; v1(327.787,232.664) D5.2@329.07,232.664 ; v1(328.422,233.9) 328.964,234.442 C57.1@329.952,234.442 329.952,234.452 330.823,235.323 330.823,235.708 U1.44@330.996,235.881 ; v1(330.962,229.87) 330.962,229.812 331.708,229.066 U5.8@332.549,229.066 ; U1.27@330.996,247.481 330.996,245.096 331.746,244.346 U1.26@331.746,247.481 ; U1.55@332.396,243.696 U1.25@332.396,247.481 ; v1(332.74,232.537) 333.04,232.837 C24.2@333.04,233.515 ; U1.55@333.046,243.046 U1.24@333.046,247.481 ; U1.55@333.696,242.396 U1.23@333.696,247.481 ; U1.49@334.346,235.881 334.387,235.84 334.387,235.03 v1(334.428,234.989) ; U1.22@334.346,247.481 334.346,241.746 U1.55@334.411,241.681 336.946,244.216 U1.18@336.946,247.481 ; U1.55@334.996,242.266 U1.21@334.996,247.481 ; U1.55@335.646,242.916 U1.20@335.646,247.481 ; U1.55@336.296,243.566 U1.19@336.296,247.481 ; U5.2@336.359,229.066 336.387,229.094 336.387,230.334 C18.1@336.431,230.378 ; C56.2@337.558,234.442 v1(338.616,234.442) 338.616,233.594 338.468,233.445 338.341,233.445 338.09,233.194 R11.2@338.09,233.172
  other v1: 317.5,234.442
PWM_HS_HP: C25.1 R12.2 U2.47 | length 5.2
  Top Layer w0.254: U2.47@351.461,235.881 351.461,234.726 351.288,234.553 C25.1@351.282,234.553 351.455,234.38 351.698,234.38 351.895,234.183 352.044,234.034 R12.2@352.044,231.259
PWM_HS_LP: U4.2 U6.11
PWM_LS_HP: C24.1 R7.2 U1.47 | length 5.3
  Top Layer w0.254: U1.47@333.046,235.881 333.046,234.861 332.873,234.688 332.867,234.688 333.186,234.369 333.575,234.369 333.756,234.188 R7.2@333.756,231.259
PWM_LS_LP: U4.8 U5.11
RDRV_HS_HP: C55.1 R8.1 R9.1 U2.52 | length 4.3
  Top Layer w0.254: U2.52@354.711,235.881 354.715,235.877 354.715,234.446 C55.1@354.719,234.442 354.763,234.398 354.763,233.216 R9.1@354.806,233.172 R8.1@354.806,231.648
RDRV_LS_HP: C56.1 R10.1 R11.1 U1.52 | length 4.4
  Top Layer w0.254: U1.52@336.296,235.881 336.296,234.754 336.558,234.492 C56.1@336.558,234.442 336.546,234.43 336.546,233.184 R11.1@336.534,233.172 R10.1@336.534,231.648
SENSE_5V: Q2.3 R16.1 U8.18 | length 6.7
  Top Layer w0.381: R16.1@236.474,257.198 236.82,256.852 U8.18@243.075,256.852
SENSE_12V: Q3.3 R24.1 U11.18 | length 7.8
  Top Layer w0.381: R24.1@272.923,277.444 274.066,277.444 274.447,277.063 274.447,276.86 275.59,275.717 278.626,275.717 278.88,275.971 U11.18@279.819,275.971
SOFT_START_OUT: C5.2 L2.1 Q1.5 Q1.6 Q1.7 Q1.8
SW: C22.1 C25.2 C48.1 C49.2 C55.2 D1.1 D2.1 D4.2 L2.2 L3.2 R2.1 R3.1 R9.2 U1.2 U1.3 U1.4 U1.5 U1.6 U1.7 U1.8 U1.9 U1.10 U1.11 U1.12 U1.13 U1.14 U1.15 U2.18 U2.19 U2.20 U2.21 U2.22 U2.23 U2.24 U2.25 U2.26 U2.27 U2.28 U2.29 U2.30 U2.31 U2.32 U2.33 U2.34 U2.35 U2.36 U2.37 U2.38 U2.39 U2.40 U2.44 U2.45 U2.49 U2.55 U6.2 U6.8 | length 60.2
  Top Layer w0.254: v1(345.694,233.553) 345.694,233.622 345.616,233.7 345.616,234.204 346.108,234.696 L3.2@346.583,234.696 ; v1(346.202,232.41) 346.271,232.41 346.652,232.029 D4.2@347.485,232.029 ; v1(346.964,233.426) 347.991,233.426 348.364,233.799 C48.1@348.364,233.807 348.364,234.734 349.411,235.781 U2.44@349.411,235.881 U2.45@350.161,235.881 ; U2.27@349.411,247.481 349.411,245.096 350.811,243.696 U2.25@350.811,247.481 ; v1(349.758,229.108) 350.796,229.108 U6.8@350.837,229.066 ; U2.55@350.139,246.38 350.161,246.402 U2.26@350.161,247.481 ; C25.2@351.282,233.553 351.293,233.542 351.293,232.653 v1(351.305,232.641) ; U2.55@351.461,243.046 U2.24@351.461,247.481 ; U2.55@352.111,242.396 U2.23@352.111,247.481 ; U2.49@352.761,235.881 352.783,235.858 352.783,234.846 v1(352.806,234.823) ; U2.22@352.761,247.481 352.761,241.746 U2.55@352.826,241.681 355.361,244.216 U2.18@355.361,247.481 ; U2.55@353.411,242.266 U2.21@353.411,247.481 ; U2.55@354.061,242.916 U2.20@354.061,247.481 ; C49.2@354.592,230.378 354.62,230.35 354.62,229.094 U6.2@354.647,229.066 ; U2.55@354.711,243.566 U2.19@354.711,247.481 ; C55.2@355.719,234.442 355.746,234.469 356.685,234.469 v1(356.712,234.496) 356.712,233.544 356.362,233.194 R9.2@356.362,233.172
TC_5V: R18.1 U8.11 | length 1.4
  Top Layer w0.254: U8.11@243.075,261.402 243.078,261.405 R18.1@243.078,262.763
TC_12V: R26.1 U11.11 | length 2.5
  Top Layer w0.254: R26.1@279.629,282.067 279.556,281.995 279.556,281.506 278.981,280.931 278.981,280.721 279.13,280.572 279.768,280.572 U11.11@279.819,280.521
TEMP_HS_HP: U2.51 U6.3 | length 6.9
  Top Layer w0.254: U6.3@354.012,229.066 353.985,229.094 353.985,229.622 353.962,229.645 353.962,235.582 353.988,235.608 353.988,235.808 U2.51@354.061,235.881
TEMP_HS_LP: U6.14
TEMP_LS_HP: U1.51 U5.3 | length 6.8
  Top Layer w0.254: U1.51@335.646,235.881 335.697,235.83 335.697,229.094 U5.3@335.724,229.066
TEMP_LS_LP: U5.14
UNFILTERED_OUTPUT: C1.2 C3.1 C62.2 D1.2 L1.2 U2.2 U2.3 U2.4 U2.5 U2.6 U2.7 U2.8 U2.9 U2.10 U2.11 U2.12 U2.13 U2.14 U2.15
VBAT+: C4.1 C33.2 C43.2 D3.1 J2.2 Q1.1 Q1.2 Q1.3 R5.2 R13.1 R21.1 T1.8 T2.8 U8.1 U8.2 U8.3 U11.1 U11.2 U11.3
VC_5V: R14.1 U8.13 | length 1.6
  Top Layer w0.254: R14.1@241.491,259.969 242.466,259.969 242.599,260.102 U8.13@243.075,260.102
VC_12V: R22.1 U11.13 | length 1.7
  Top Layer w0.254: R22.1@278.194,279.019 278.194,279.064 278.351,279.221 U11.13@279.819,279.221
Vin_HS_HP: C48.2 D4.1 U2.46 U13.1
  other v1: 320.294,227.711 320.294,229.108 346.964,229.108 348.234,229.108 358.775,229.235 360.045,229.235
VIOUT_CS_LP: C50.1 U3.12 | length 2.4
  Top Layer w0.254: U3.12@437.007,228.181 437.007,225.971 C50.1@437.134,225.844
VREF_CS: C51.2 R1.1 U3.13 | length 4.1
  Top Layer w0.254: U3.13@438.277,228.181 438.277,226.2 438.671,225.806 C51.2@438.696,225.806 438.62,225.73 R1.1@438.62,224.282
VSENSE+: C63.2 R29.2
VSENSE-: C63.1 R32.2
pads on no net: J1.5 L2.MH1 L2.MH2 T1.9 T1.MH1 T1.MH2 T2.9 T2.MH1 T2.MH2 U1.1 U1.16 U1.17 U1.54 U2.1 U2.16 U2.17 U2.54 U4.3 U4.4 U4.5 U4.6 U4.7 U4.9 U4.10 U4.11 U4.13 U4.14 U4.17 U4.18 U4.19 U4.20 U4.21 U4.22 U4.23 U4.24 U4.26 U4.30 U4.33 U4.34 U4.35 U4.36 U4.37 U4.38 U4.39 U4.40 U4.41 U4.42 U4.43 U4.44 U4.45 U4.46 U4.49 U4.50 U4.51 U4.52 U4.53 U4.54 U4.55 U4.56 U4.57 U4.58 U4.59 U4.60 U4.61 U4.62 U16.2 U16.3 U16.5
copper on no net:
  other v1: 309.364,233.672 279.519,273.423

## Polygon pours and split planes (outlines as drawn)
SW on Top Layer "SW_L01_P000" (solid, remove dead copper, pour order 0): 340.233,253.365 340.487,253.619 343.281,253.619 344.17,254.508 344.17,269.748 345.44,271.018 352.679,271.018 355.727,274.066 366.522,274.066 368.49,272.097 368.49,260.032 368.046,259.588 366.014,259.588 359.664,253.238 357.505,253.238 355.6,251.333 355.6,246.888 355.346,246.634 349.25,246.634 348.869,246.253 348.869,238.76 348.615,238.506 344.805,238.506 343.281,236.982 342.138,236.982 342.064,237.056 342.064,237.236 340.995,237.236 340.868,237.363 340.868,247.609 342.052,247.609 342.011,247.65 342.011,249.047 341.376,249.682 340.487,249.682 340.233,249.936
HT+ on Top Layer "HT+_L01_P024" (solid, remove dead copper, pour order 24): 438.277,235.839 437.769,236.347 437.769,240.411 438.658,241.3 449.326,241.3 450.723,239.903 450.723,237.871 448.691,235.839
FILTERED_OUTPUT on Top Layer "FILTERED_OUTPUT_L01_P022" (solid, remove dead copper, pour order 22): 380.619,242.189 383.159,244.729 436.499,244.729 437.515,243.713 437.515,236.728 436.499,235.712 381.254,235.712 381.254,236.347 380.619,236.982 372.237,236.982 371.983,237.236 371.983,241.935 372.237,242.189
UNFILTERED_OUTPUT on Top Layer "UNFILTERED_OUTPUT_L01_P020" (solid, remove dead copper, pour order 20): 365.76,237.109 366.141,237.49 366.141,255.016 365.252,255.905 363.347,255.905 362.712,255.27 362.712,253.365 361.569,252.222 361.569,247.396 360.426,246.253 359.537,246.253 359.41,246.126 359.41,237.109
VBAT+ on Top Layer "VBAT+_L01_P021" (solid, remove dead copper, pour order 21): 248.285,257.302 248.158,257.175 248.158,250.698 248.285,250.571 249.428,250.571 250.063,249.936 250.063,245.745 251.46,244.348 251.46,241.681 251.079,241.3 249.428,241.3 248.793,240.665 248.793,239.268 249.301,238.76 251.841,238.76 253.238,240.157 253.238,253.619 249.555,257.302
Vin_HS_HP on Top Layer "VIN_HS_HP_L01_P019" (solid, remove dead copper, pour order 19): 346.583,229.362 346.583,228.727 346.71,228.6 348.488,228.6 348.742,228.854 348.742,229.616 350.52,231.394 350.52,234.95 351.028,235.458 351.028,236.347 350.647,236.347 350.52,236.22 350.52,235.458 349.504,234.442 349.25,234.442 349.25,233.172 349.504,232.918 349.631,232.918 349.631,231.521 347.853,229.743 346.964,229.743
Vin_HS_HP on Top Layer "VIN_HS_HP_L01_P017" (solid, remove dead copper, pour order 17): 316.738,229.489 317.246,229.997 320.548,229.997 320.929,229.616 320.929,227.203 320.675,226.949 316.865,226.949 316.738,227.076
5V_Ctrl on Top Layer "5V_CTRL_L01_P016" (solid, remove dead copper, pour order 16): 273.685,215.9 273.939,216.154 275.59,216.154 276.225,215.519 276.225,212.09 276.733,211.582 281.686,211.582 282.321,212.217 284.226,212.217 284.48,211.963 284.48,208.915 284.226,208.661 282.067,208.661 281.813,208.407 277.114,208.407 273.685,211.836
Ctrl_Primary- on Top Layer "CTRL_PRIMARY-_L01_P009" (solid, remove dead copper, pour order 9): 248.412,244.094 248.793,243.713 248.793,241.808 248.285,241.3 246.888,241.3 246.888,241.427 245.237,243.078 234.442,243.078 233.934,243.586 233.934,250.063 234.188,250.317 240.157,250.317 241.808,248.666 243.205,248.666 243.332,248.539 243.332,246.761
SENSE_5V on Top Layer "SENSE_5V_L01_P012" (solid, remove dead copper, pour order 12): 234.188,252.095 234.315,251.968 235.585,251.968 235.966,252.349 235.966,254.762 236.728,255.524 238.252,255.524 238.506,255.778 238.506,258.572 238.379,258.699 234.569,258.699 234.188,258.318
NetC26_1 on Top Layer "NETC26_1_L01_P013" (solid, remove dead copper, pour order 13): 242.316,250.063 242.189,249.936 242.189,248.958 242.273,248.874 242.318,248.92 243.459,248.92 243.84,248.539 243.84,247.015 243.967,246.888 245.11,246.888 245.364,247.142 245.364,250.571 245.237,250.698 244.094,250.698 243.459,250.063
Ctrl_Secondary+ on Top Layer "CTRL_SECONDARY+_L01_P014" (solid, remove dead copper, pour order 14): 264.795,225.425 264.414,225.044 264.414,223.52 265.176,222.758 270.891,222.758 273.558,220.091 273.558,217.17 273.939,216.789 275.717,216.789 276.098,217.17 276.098,220.98 271.653,225.425
Gate_Secondary+ on Top Layer "GATE_SECONDARY+_L01_P007" (solid, remove dead copper, pour order 7): 315.214,240.411 314.871,240.068 311.188,240.068 311.15,240.03 303.149,240.03 302.133,241.046 302.133,242.316 302.641,242.824 314.833,242.824 315.214,242.443
12V_Gate on Top Layer "12V_GATE_L01_P008" (solid, remove dead copper, pour order 8): 315.087,230.124 316.103,231.14 331.343,231.14 332.105,231.902 332.105,234.95 332.232,234.95 332.74,235.458 332.74,236.347 332.105,236.347 331.978,236.22 331.978,235.331 331.724,235.077 330.962,235.077 330.835,234.95 330.835,233.807 330.962,233.68 331.089,233.68 331.216,233.553 331.216,231.902 330.962,231.648 330.835,231.775 315.849,231.775 315.087,232.537 315.087,236.347 314.515,236.918 314.452,236.918 314.452,238.633 314.109,238.976 312.128,238.976 311.912,238.76 311.912,230.886 311.785,230.759 311.785,226.949 312.033,226.701 314.585,226.701 315.087,227.203
SENSE_12V on Top Layer "SENSE_12V_L01_P006" (solid, remove dead copper, pour order 6): 274.701,276.606 272.923,274.828 272.923,272.923 272.542,272.542 271.399,272.542 271.018,272.923 271.018,277.749 271.069,277.749 271.323,278.003 274.574,278.003 274.701,277.876
VBAT+ on Top Layer "VBAT+_L01_P002" (solid, remove dead copper, pour order 2): 285.115,276.606 284.861,276.352 284.861,274.193 284.353,273.685 284.353,269.748 286.512,267.589 286.512,264.922 289.433,262.001 289.433,259.08 289.052,258.699 286.766,258.699 286.385,258.318 286.385,256.413 286.893,255.905 289.433,255.905 291.846,258.318 291.846,263.525 289.306,266.065 289.306,275.971 288.671,276.606
NetC38_1 on Top Layer "NETC38_1_L01_P005" (solid, remove dead copper, pour order 5): 278.892,268.986 278.638,268.732 278.638,267.97 278.642,267.97 278.849,267.763 280.242,267.763 280.543,267.462 280.543,265.938 280.67,265.811 281.94,265.811 282.067,265.938 282.067,269.367 281.94,269.494 280.797,269.494 280.289,268.986
Gate_Primary- on Top Layer "GATE_PRIMARY-_L01_P004" (solid, remove dead copper, pour order 4): 284.924,258.699 278.892,263.94 271.746,263.94 271.018,264.668 271.018,270.891 271.78,271.653 277.495,271.653 278.13,271.018 278.13,267.843 278.638,267.335 280.035,267.335 280.035,267.208 280.289,266.954 280.289,265.811 286.385,261.493 286.639,261.239 286.639,259.334 286.004,258.699
PGND on Top Layer "PGND_L01_P001" (solid, remove dead copper, pour order 1): 337.185,248.92 336.804,249.301 332.994,249.301 332.994,249.876 332.456,250.414 332.712,250.67 332.712,252.123 332.359,252.476 328.295,252.476 326.263,250.444 326.263,239.395 326.517,239.141 328.549,239.141 329.057,238.633 330.454,238.633 330.454,246.888 337.185,246.888
Vin_HS_HP on Bottom Layer "VIN_HS_HP_L04_P018" (solid, remove dead copper, pour order 18): 360.172,227.203 361.061,228.092 361.061,229.743 360.68,230.124 358.013,230.124 357.759,229.87 357.759,228.981 356.997,228.219 348.869,228.219 348.615,228.473 348.615,229.489 348.361,229.743 346.329,229.743 345.44,228.854 321.691,228.854 320.802,229.743 320.04,229.743 319.786,229.489 319.786,227.457 320.04,227.203
no net on Layer 2 (split plane): 458.976,199.519 230.253,199.519 230.253,299.083 458.976,299.083
no net on Layer 1 (split plane): 458.976,199.519 230.253,199.519 230.253,299.083 458.976,299.083

## Silkscreen, mask and mechanical layers (free items; w line width, h text height)
Top Overlay:
  lines w0.214: 229.616,231.521 275.654,231.457 ; 280.797,226.441 367.538,226.441 ; 373.888,232.918 459.358,232.918
  lines w0.254: 275.717,231.394 280.67,226.441 ; 367.538,226.441 373.888,232.918 ; 229.743,199.009 459.486,199.009 459.486,299.593 229.743,299.593 229.743,199.009

## Text inside footprints (layer, text, board x,y; h text height)
D4: Top Overlay "*" at 350.901,232.283 h0.5 r180
D5: Top Overlay "*" at 332.486,232.918 h0.5 r180
J1: Top Overlay "*" at 282.47,212.143 h1.27; Mechanical 13 "*" at 282.471,212.142 h1.27
U3: Top Overlay "*" at 442.519,238.227 h1.27 r270; Mechanical 13 "*" at 441.541,236.652 h1.27 r270
U8: Top Overlay "*" at 249.451,255.324 h1.27 r180; Mechanical 13 "*" at 248.162,256.521 h1.27 r180
U11: Top Overlay "*" at 286.195,274.442 h1.27 r180; Mechanical 13 "*" at 284.905,275.64 h1.27 r180
U14: Top Overlay "*" at 490.258,222.58 h1.27 r180; Mechanical 13 "*" at 487.985,223.291 h1.27 r180
U16: Top Overlay "*" at 462.862,172.31 h1.27 r90; Mechanical 13 "*" at 462.863,172.311 h1.27 r90